# Altium PCB Strathim PCB V1.0.PcbDoc
Units mm, origin at the board's own origin, x right, y up, seen from the top; angles counter-clockwise.
Board outline 35 x 35 mm, 6 copper layers (Component Side, Ground Plane (GND), Inner Layer 1, Inner Layer 2, Power Plane (VCC), Solder Side), stack 1.297 mm thick; 74 components, 88 nets, 529 pads, 196 vias.
Unrouted connection lines stored in the file: 271.
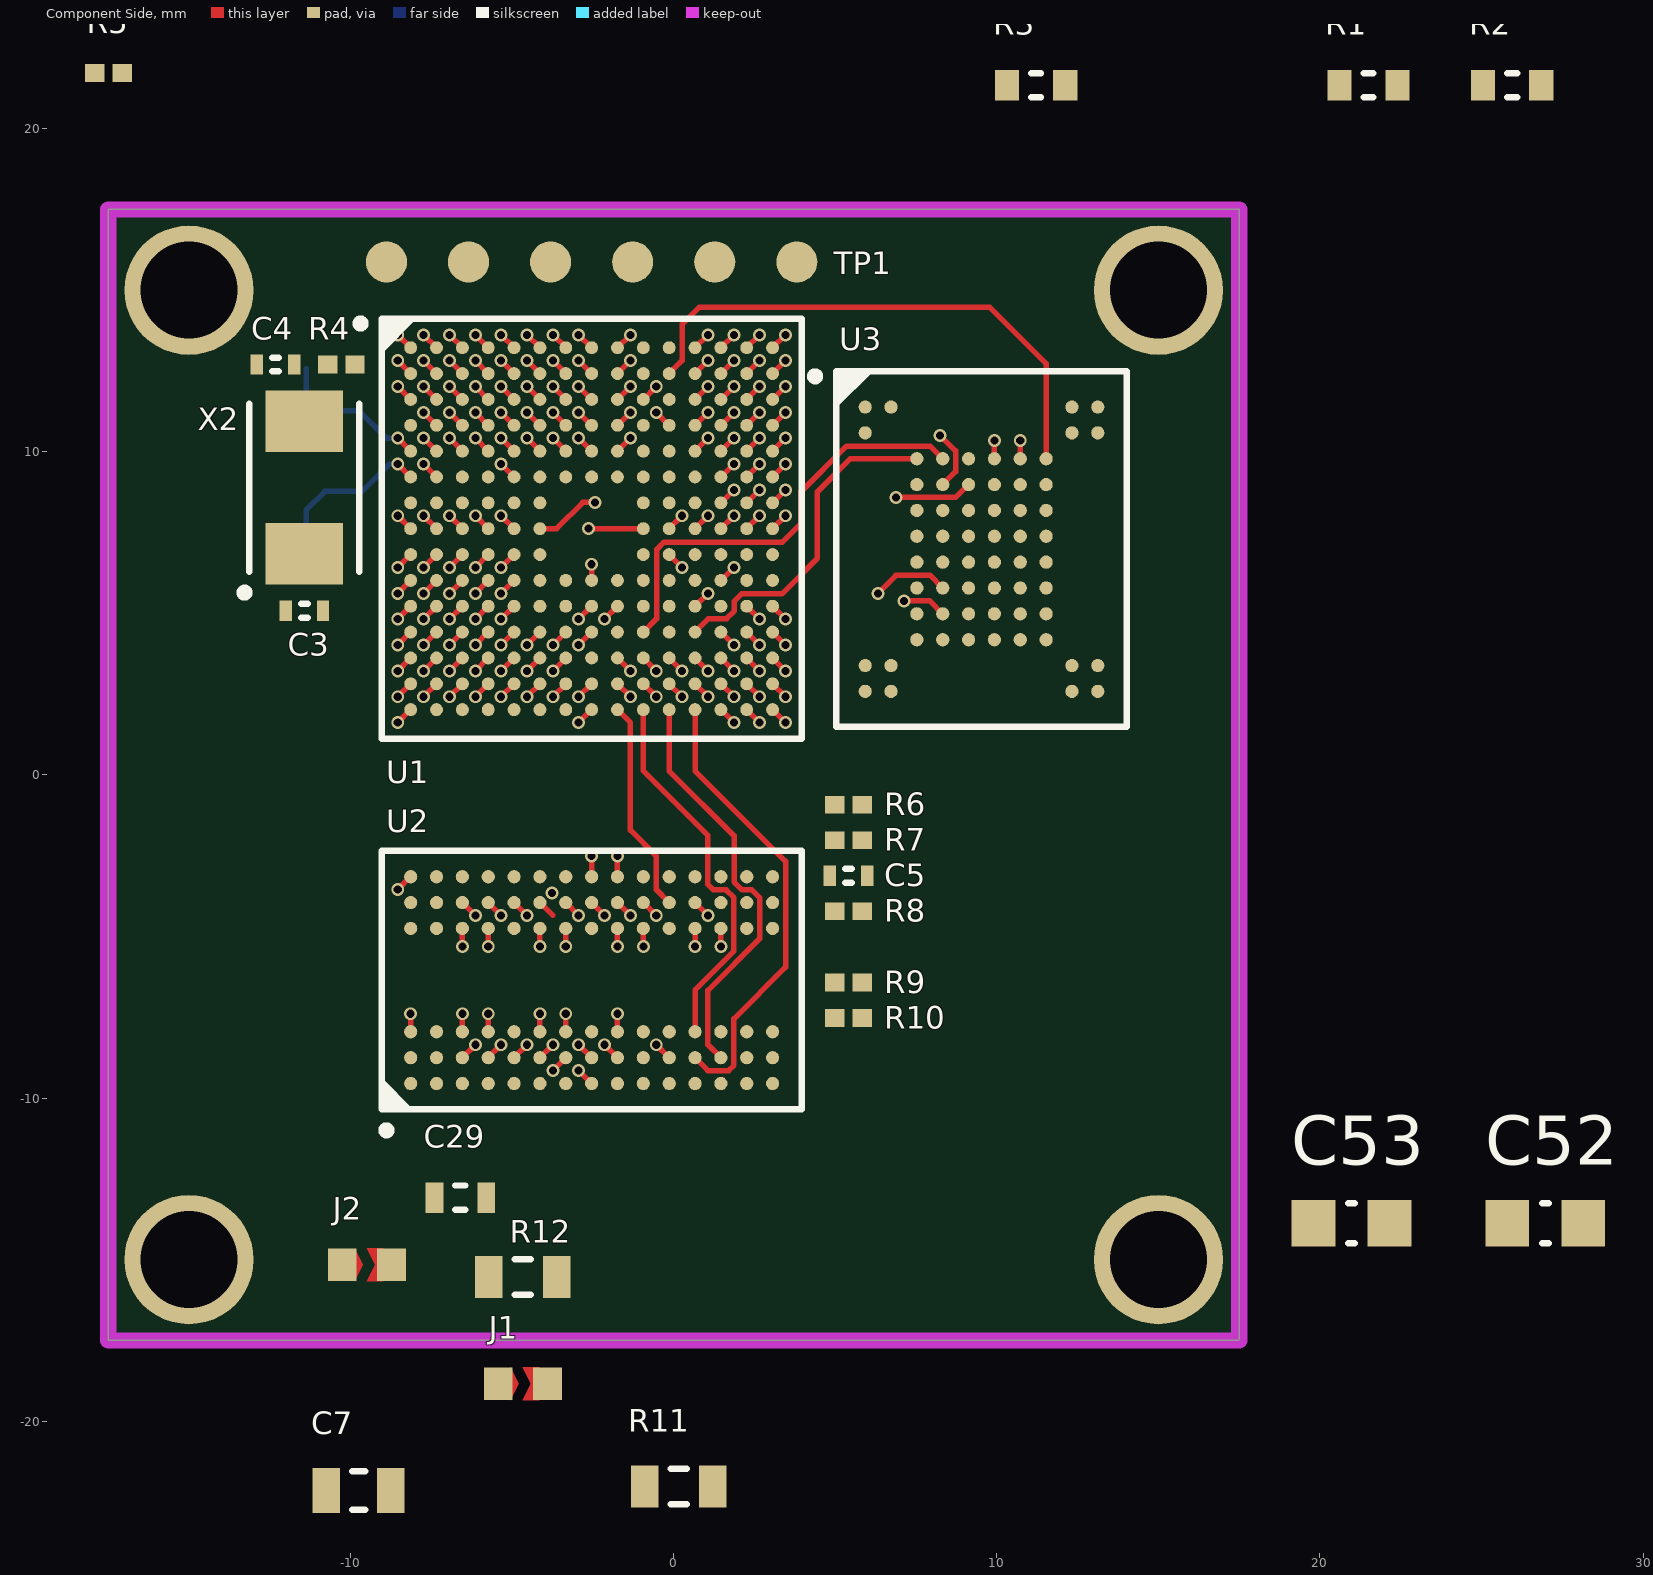
[diagram p0: Component Side view]
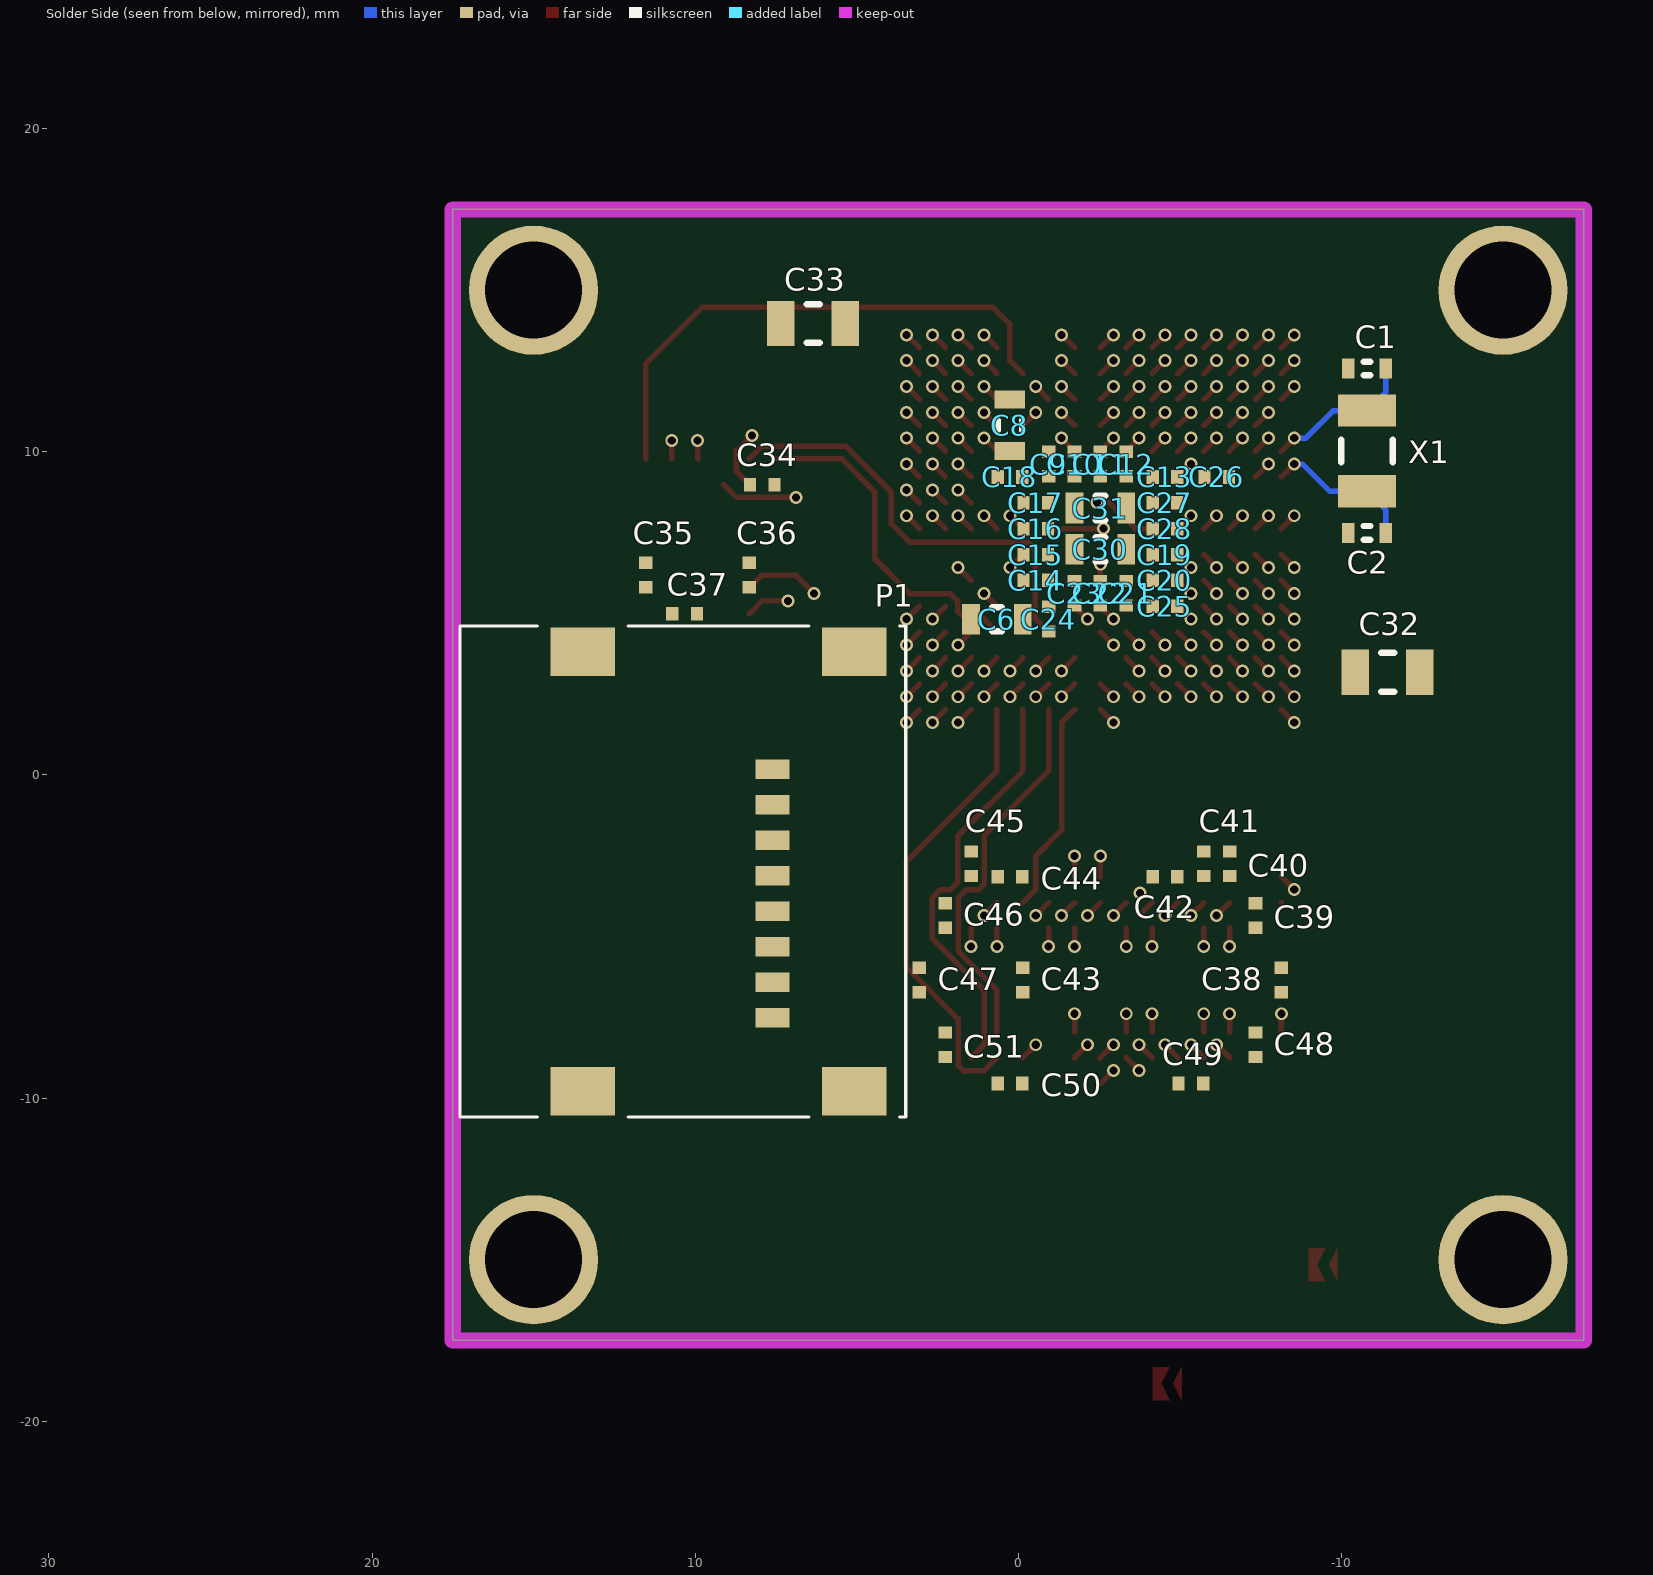
[diagram p1: Solder Side view, seen from below]
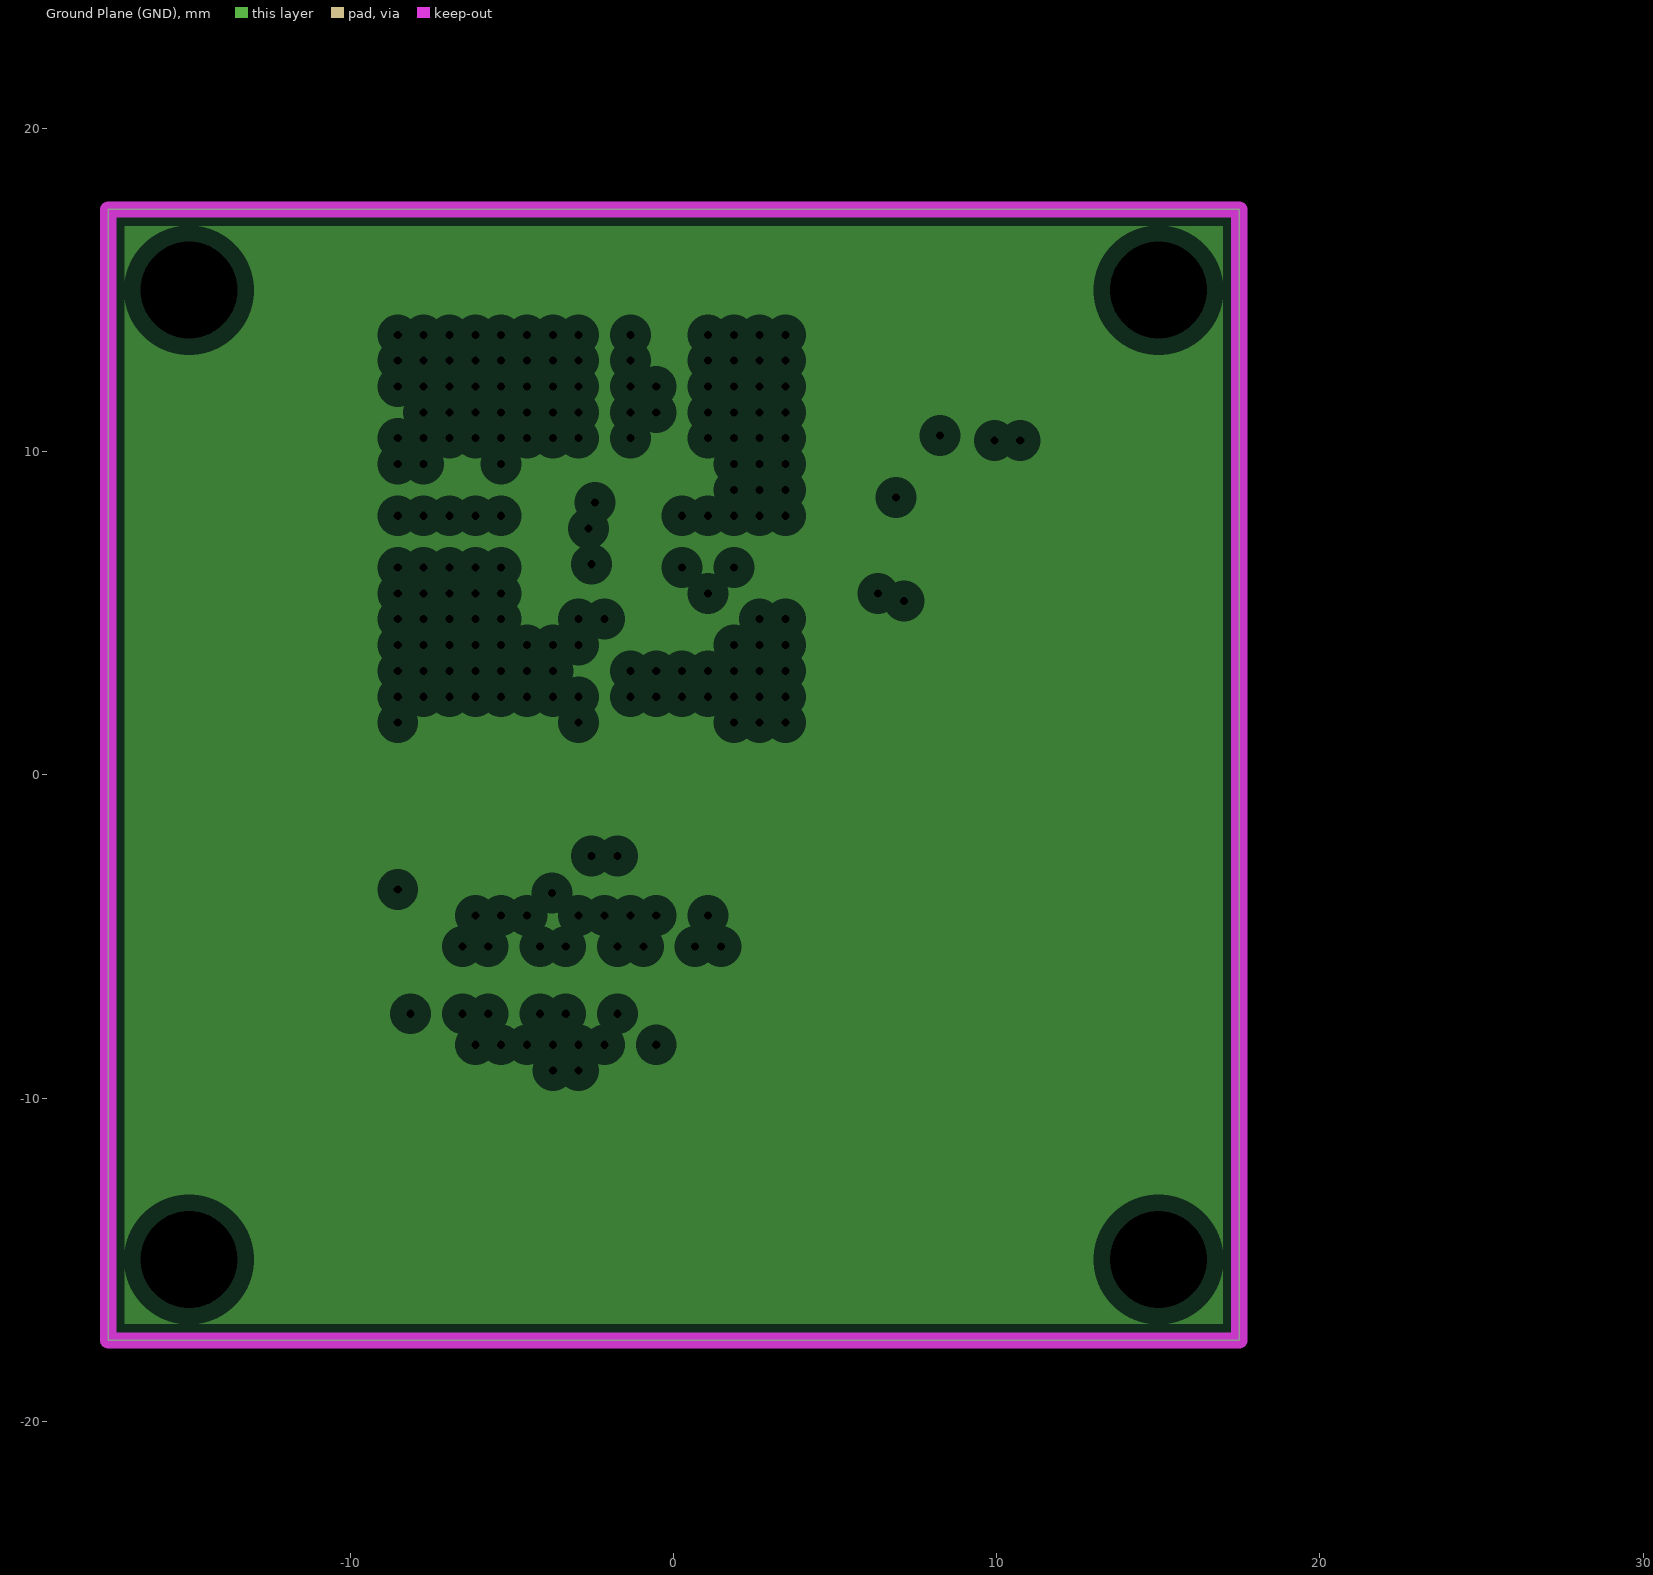
[diagram p2: Ground Plane (GND), clearances drawn from the general rule]
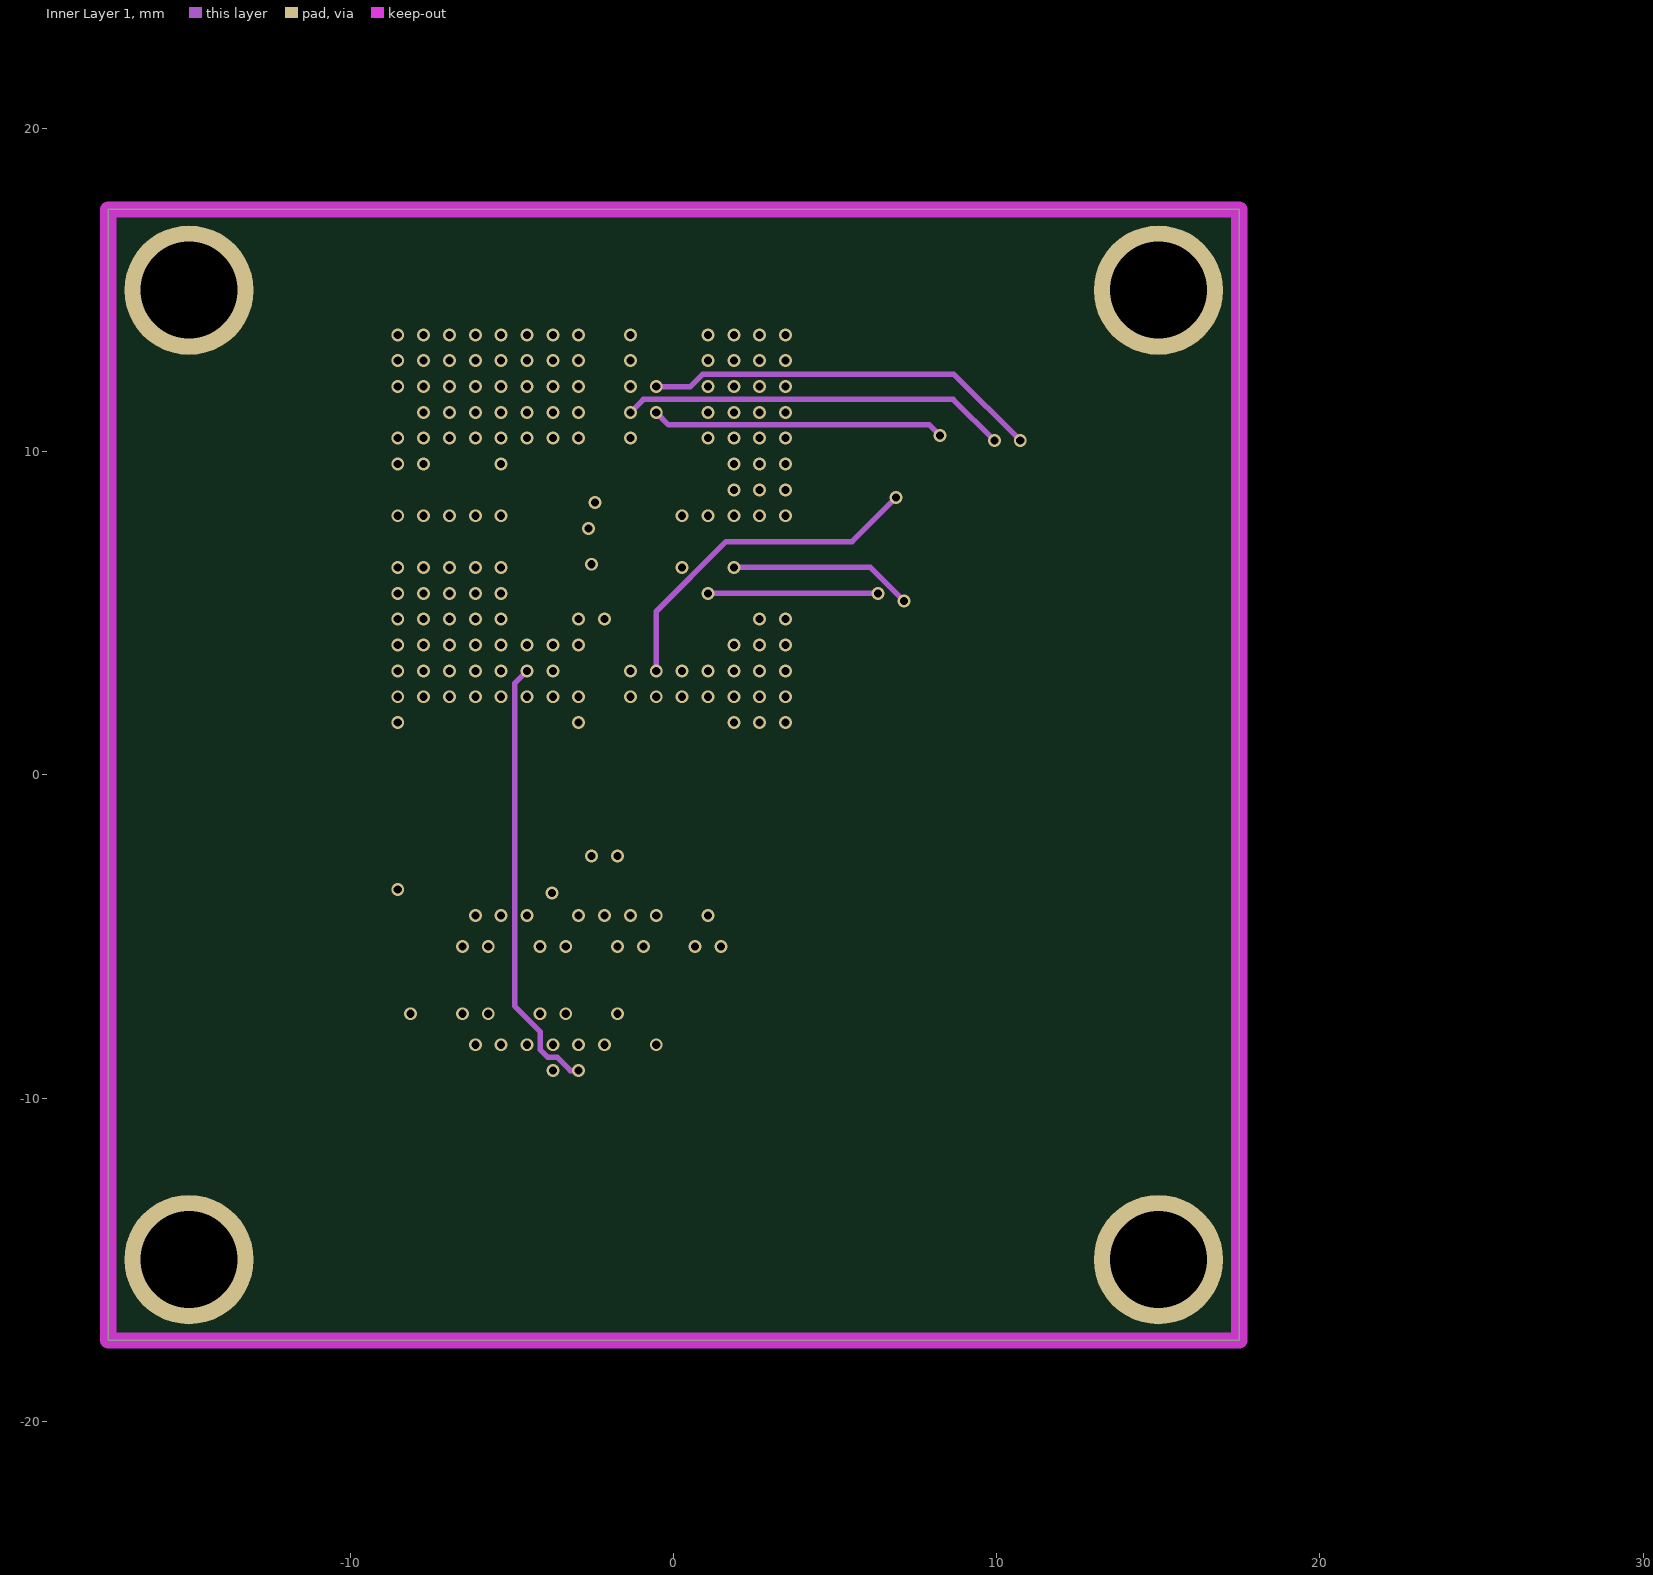
[diagram p3: Inner Layer 1]
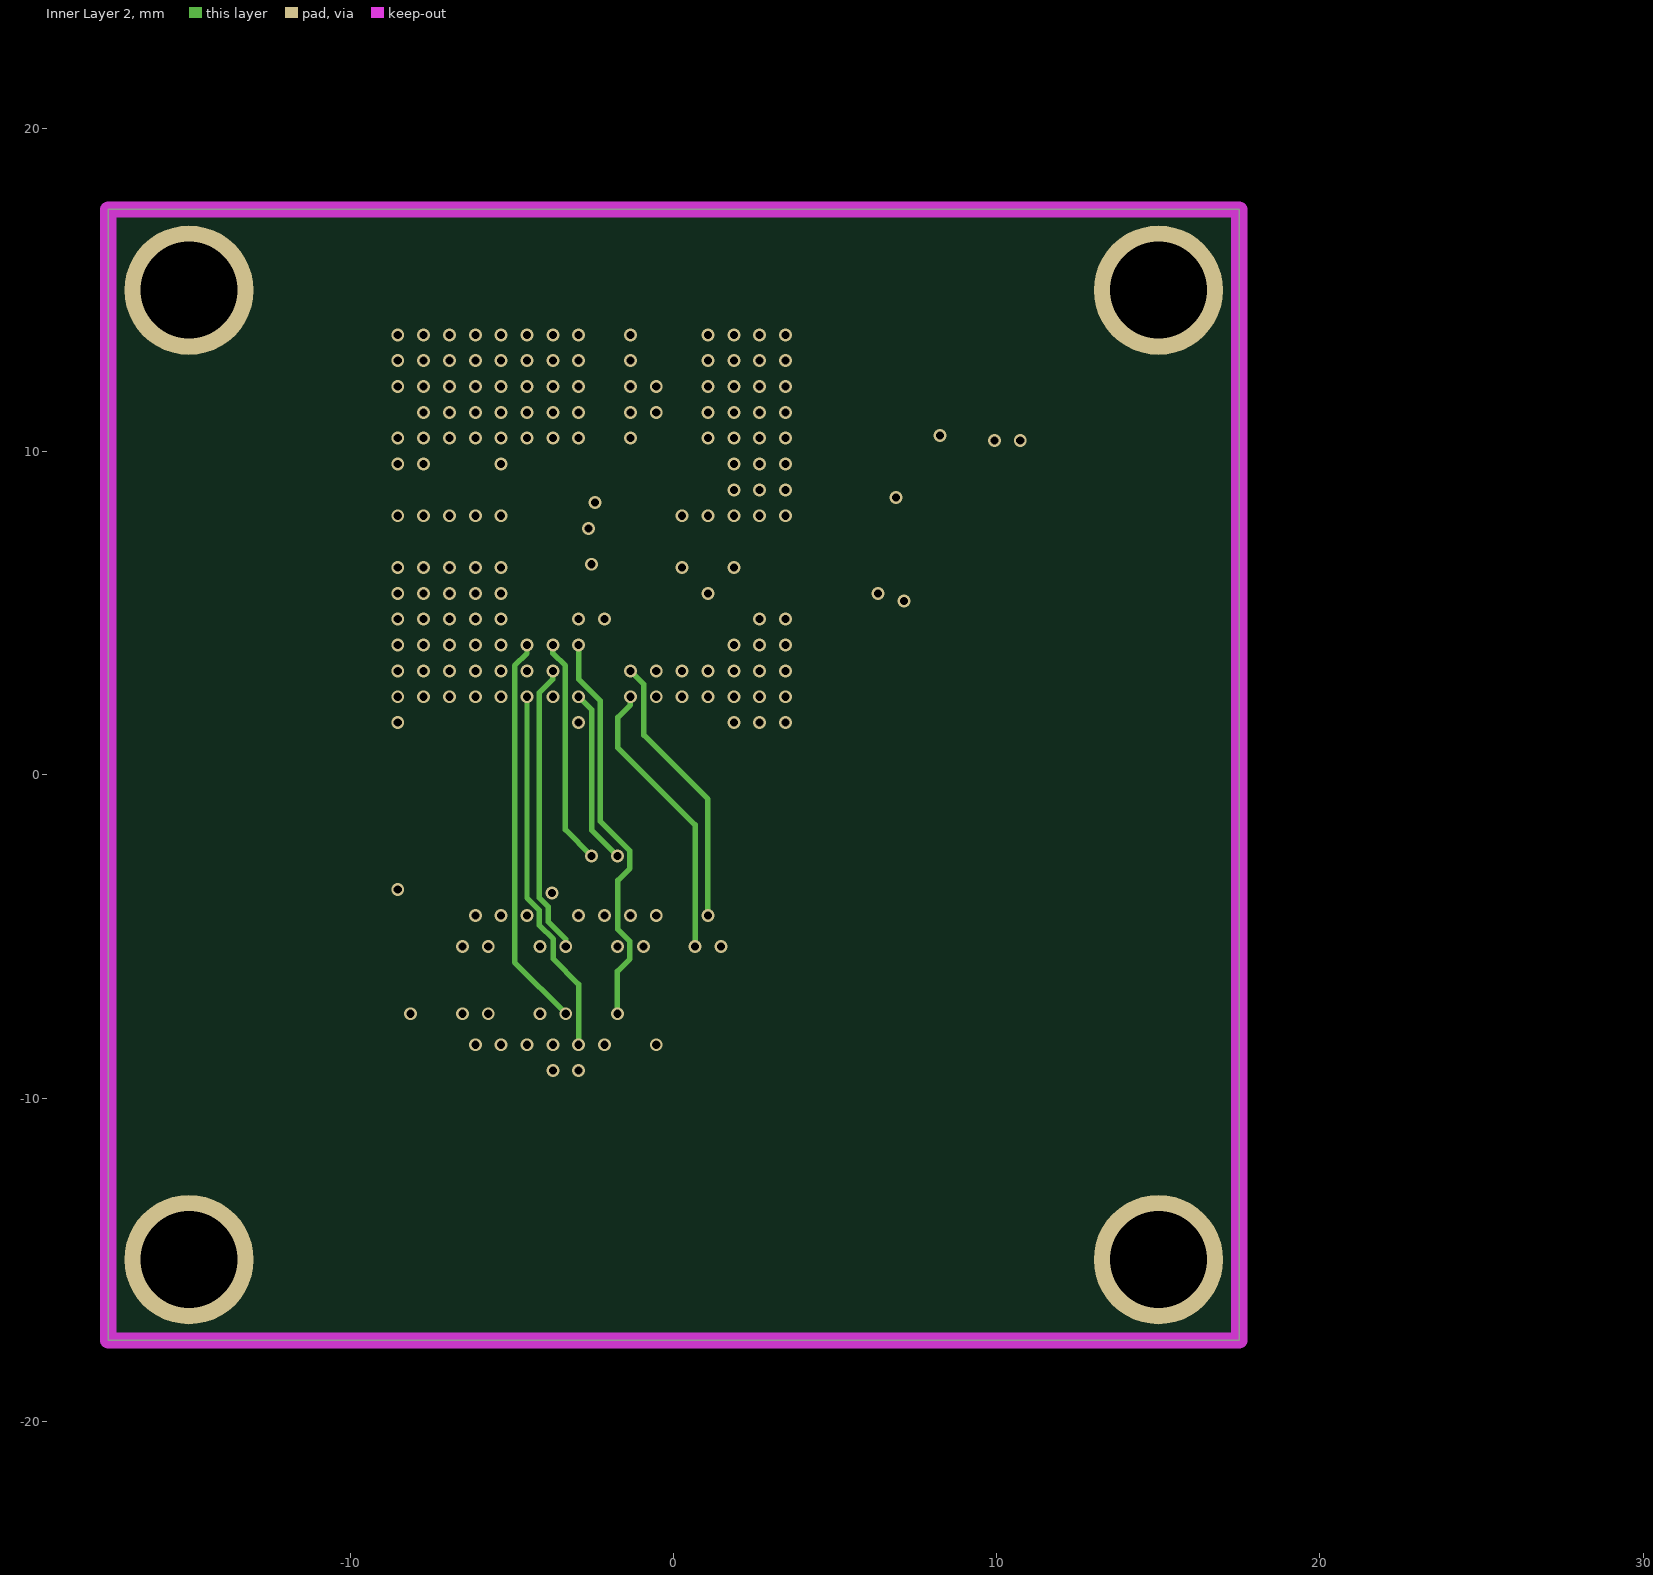
[diagram p4: Inner Layer 2]
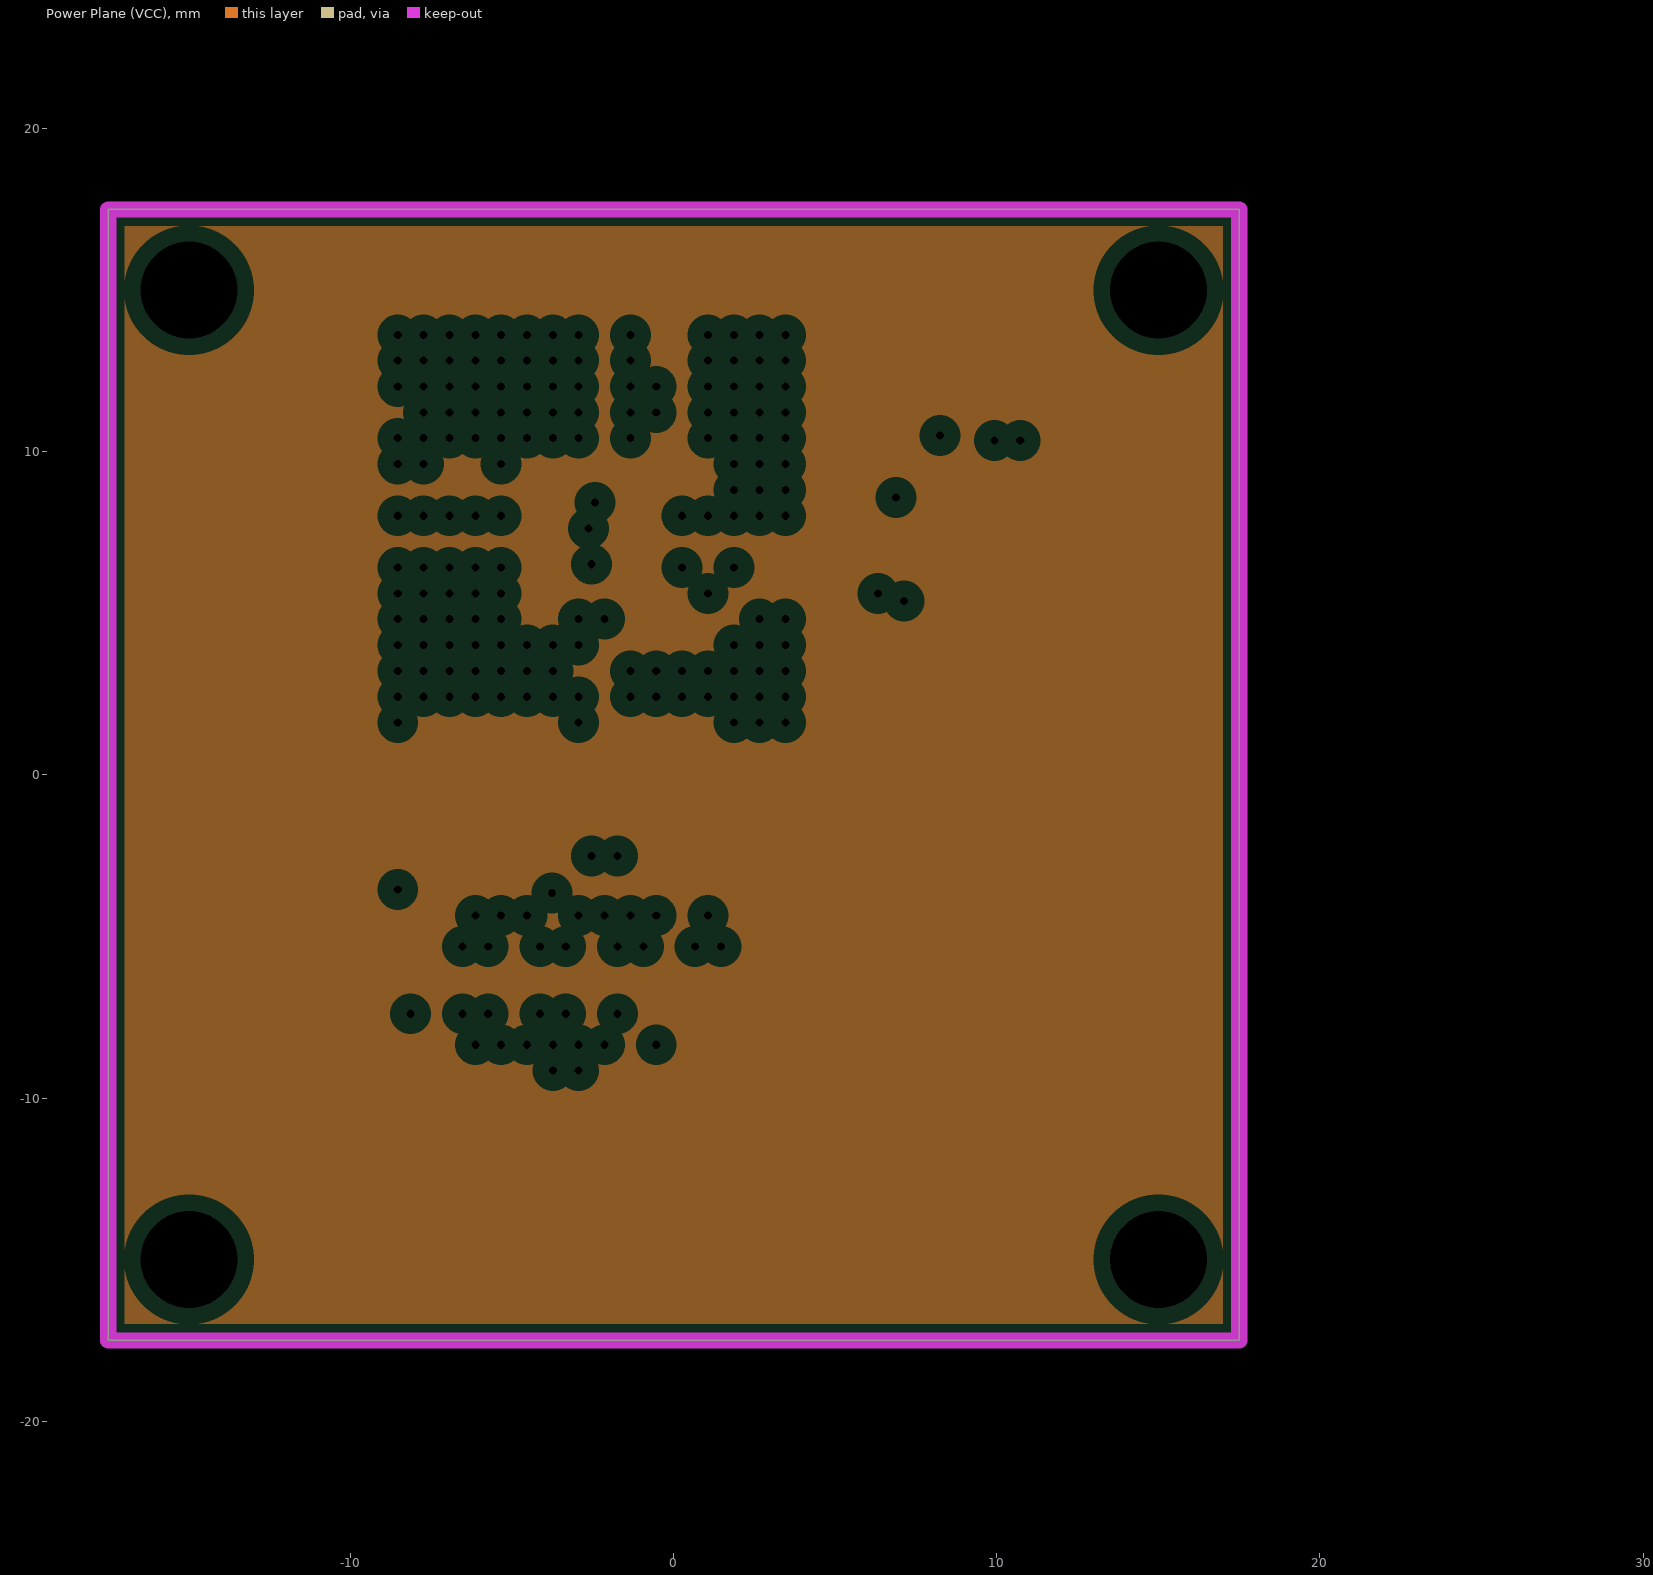
[diagram p5: Power Plane (VCC), clearances drawn from the general rule]

## Layer stack, top to bottom
Top Solder: solder mask 0.0102, Solder Resist, Dk 3.5
Component Side: signal copper 0.0356
Dielectric 1: core 0.32, FR-4, Dk 4.8
Ground Plane (GND): plane copper 0.036
Dielectric 3: prepreg 0.127, Dk 4.2
Inner Layer 1: signal copper 0.036
Dielectric 6: core 0.254, Dk 4.2
Inner Layer 2: signal copper 0.036
Dielectric 5: prepreg 0.127, Dk 4.2
Power Plane (VCC): plane copper 0.036
Dielectric 4: core 0.254, Dk 4.2
Solder Side: signal copper 0.0356
Bottom Solder: solder mask 0.0102, Solder Resist, Dk 3.5

## Board outline
-17.5,-17.5 17.5,-17.5 17.5,17.5 -17.5,17.5

## Design rules (kind name [scope] priority, off if disabled: settings)
Clearance [All] p1: gap=0.1
PlaneClearance [All] p1: clearance=0.508
PlaneConnect [All] p1: planeconnectstyle=Relief reliefexpansion=0.508 reliefentries=4 reliefconductorwidth=0.254 reliefairgap=0.254
PolygonConnect [All] p1: connectstyle=Relief reliefconductorwidth=0.254 reliefentries=4 polygonreliefangle="90 Angle" airgapwidth=0.254
RoutingVias [All] p1: holewidth=0.2 width=0.4 viastyle="Through Hole" minholewidth=0.25 minwidth=0.4 maxholewidth=0.4 maxwidth=0.8
SolderMaskExpansion [All] p1: expansion=0.102
Width [All] p1: maxlimit=2 minlimit=0.17 preferedwidth=0.17
28 further rules are at their usual default settings.

## Classes and differential pairs
component class MCU: C1 C2 C3 C4 C5 C? P1 R1 R2 R3 R4 R5 R6 R7 R8 R9 R10 R? TP1 U1 X1 X2 X?
component class RAM: C34 C35 C36 C37 C38 C39 C40 C41 C42 C43 C44 C45 C46 C47 C48 C49 C50 C51 C52 C53 U2 U3
net class RAM: NAND_ALE NAND_CLE NAND_NCE NAND_NR/B NAND_NRE NAND_NWE NAND_NWP NetC4_2 NetR4_1 RAM_ADDR0 RAM_ADDR1 RAM_ADDR2 RAM_ADDR3 RAM_ADDR4 RAM_ADDR5 RAM_ADDR6 RAM_ADDR7 RAM_ADDR8 RAM_ADDR9 RAM_ADDR10 RAM_ADDR11 RAM_I/O0 RAM_I/O1 RAM_I/O2 RAM_I/O3 RAM_I/O4 RAM_I/O5 RAM_I/O6 RAM_I/O7 RAM_I/O8 RAM_I/O9 RAM_I/O10 RAM_I/O11 RAM_I/O12 RAM_I/O13 RAM_I/O14 RAM_I/O15 RAM_I/O16 RAM_I/O17 RAM_I/O18 RAM_I/O19 RAM_I/O20 RAM_I/O21 RAM_I/O22 RAM_I/O23 RAM_I/O24 RAM_I/O25 RAM_I/O26 RAM_I/O27 RAM_I/O28 RAM_I/O29 RAM_I/O30 RAM_I/O31 SDRAM_BA0 SDRAM_BA1 SDRAM_CKE SDRAM_CLK SDRAM_DQM0 SDRAM_DQM1 SDRAM_DQM2 SDRAM_DQM3 SDRAM_NCAS SDRAM_NCS SDRAM_NRAS
net class SDMMC: SDMMC_CK SDMMC_CMD SDMMC_D0 SDMMC_D1 SDMMC_D2 SDMMC_D3
component class PWR: C6 C7 C8 C9 C10 C11 C12 C13 C14 C15 C16 C17 C18 C19 C20 C21 C22 C23 C24 C25 C26 C27 C28 C29 C30 C31 C32 C33 C? J1 J2 J? R11 R12

## Components (designator, comment, footprint, x,y, rotation, side; value= is the part's Value field where it differs from the comment)
C1 "ChipCap 12 NP0" CAP0402 -10.795,12.573 r180 bottom
C2 "ChipCap 12 NP0" CAP0402 -10.795,7.493 r180 bottom
C3 "ChipCap 18 NP0" CAP0402 -11.43,5.08 r0 top
C4 "ChipCap 18 NP0" CAP0402 -12.319,12.7 r0 top
C5 "ChipCap 0.1u X7R" CAP0402 5.41,-3.12 r0 top
C6 "ChipCap 22u X7R" CAP0603 0.66,4.82 r180 bottom
C7 "ChipCap 22u X7R" CAP0805#1 -9.751,-22.142 r0 top
C8 "ChipCap 22u X7R" CAP0603 0.26,10.82 r270 bottom
C9 "ChipCap 0.1u X7R" CAP0201 -0.94,9.62 r90 bottom
C10 "ChipCap 0.1u X7R" CAP0201 -1.74,9.62 r90 bottom
C11 "ChipCap 0.1u X7R" CAP0201 -2.54,9.62 r90 bottom
C12 "ChipCap 0.1u X7R" CAP0201 -3.34,9.62 r90 bottom
C13 "ChipCap 0.1u X7R" CAP0201 -4.54,9.22 r180 bottom
C14 "ChipCap 0.1u X7R" CAP0201 -0.54,6.02 r0 bottom
C15 "ChipCap 0.1u X7R" CAP0201 -0.54,6.82 r0 bottom
C16 "ChipCap 0.1u X7R" CAP0201 -0.54,7.62 r0 bottom
C17 "ChipCap 0.1u X7R" CAP0201 -0.54,8.42 r0 bottom
C18 "ChipCap 0.1u X7R" CAP0201 0.26,9.22 r180 bottom
C19 "ChipCap 0.1u X7R" CAP0201 -4.54,6.82 r180 bottom
C20 "ChipCap 0.1u X7R" CAP0201 -4.54,6.02 r180 bottom
C21 "ChipCap 0.1u X7R" CAP0201 -3.34,5.62 r270 bottom
C22 "ChipCap 0.1u X7R" CAP0201 -2.54,5.62 r270 bottom
C23 "ChipCap 0.1u X7R" CAP0201 -1.74,5.62 r270 bottom
C24 "ChipCap 0.1u X7R" CAP0201 -0.94,4.82 r90 bottom
C25 "ChipCap 0.1u X7R" CAP0201 -4.54,5.22 r180 bottom
C26 "ChipCap 0.1u X7R" CAP0201 -6.14,9.22 r0 bottom
C27 "ChipCap 0.1u X7R" CAP0201 -4.54,8.42 r180 bottom
C28 "ChipCap 0.1u X7R" CAP0201 -4.54,7.62 r180 bottom
C29 "ChipCap 0.1u X7R" CAP0603 -6.604,-13.081 r0 top
C30 "ChipCap 22u X7R" CAP0603 -2.54,6.98 r180 bottom
C31 "ChipCap 22u X7R" CAP0603 -2.54,8.26 r180 bottom
C32 "ChipCap 22u X7R" CAP0805#1 -11.43,3.175 r180 bottom
C33 "ChipCap 22u X7R" CAP0805#1 6.35,13.97 r0 bottom
C34 "ChipCap 0.1u X7R" CAP0201 7.925,8.985 r180 bottom
C35 "ChipCap 0.1u X7R" CAP0201 11.525,6.185 r270 bottom
C36 "ChipCap 0.1u X7R" CAP0201 8.325,6.185 r90 bottom
C37 "ChipCap 0.1u X7R" CAP0201 10.325,4.985 r180 bottom
C38 "ChipCap 0.1u X7R" CAP0201 -8.14,-6.35 r90 bottom
C39 "ChipCap 0.1u X7R" CAP0201 -7.34,-4.35 r270 bottom
C40 "ChipCap 0.1u X7R" CAP0201 -6.54,-2.75 r270 bottom
C41 "ChipCap 0.1u X7R" CAP0201 -5.74,-2.75 r270 bottom
C42 "ChipCap 0.1u X7R" CAP0201 -4.54,-3.15 r0 bottom
C43 "ChipCap 0.1u X7R" CAP0201 -0.14,-6.35 r90 bottom
C44 "ChipCap 0.1u X7R" CAP0201 0.26,-3.15 r0 bottom
C45 "ChipCap 0.1u X7R" CAP0201 1.46,-2.75 r270 bottom
C46 "ChipCap 0.1u X7R" CAP0201 2.26,-4.35 r270 bottom
C47 "ChipCap 0.1u X7R" CAP0201 3.06,-6.35 r90 bottom
C48 "ChipCap 0.1u X7R" CAP0201 -7.34,-8.35 r270 bottom
C49 "ChipCap 0.1u X7R" CAP0201 -5.34,-9.55 r0 bottom
C50 "ChipCap 0.1u X7R" CAP0201 0.26,-9.55 r180 bottom
C51 "ChipCap 0.1u X7R" CAP0201 2.26,-8.35 r270 bottom
C52 "ChipCap 10u X7R" CAP0805#2 26.975,-13.875 r0 top
C53 "ChipCap 10u X7R" CAP0805#2 20.975,-13.875 r0 top
J1 "Jumper" J0603 -4.671,-18.84 r0 top
J2 "Jumper" J0603 -9.497,-15.157 r0 top
P1 "Micro SD Card Connector" "WR-CRD SD Micro" 13.48,-9.79 r90 bottom
R1 "RES0603 10K 1%" RES0603 21.503,21.343 r0 top
R2 "RES0603 10K 1%" RES0603 25.948,21.343 r0 top
R3 "RES0603 10K 1%" RES0603 11.216,21.343 r0 top
R4 "RES0402 330R 1%" RES0402 -10.287,12.7 r180 top
R5 "RES0402 10K 1%" RES0402 -17.486,21.724 r0 top
R6 "RES0402 10K 1%" RES0402 5.41,-0.92 r180 top
R7 "RES0402 10K 1%" RES0402 5.41,-2.02 r180 top
R8 "RES0402 10K 1%" RES0402 5.41,-4.22 r180 top
R9 "RES0402 10K 1%" RES0402 5.41,-6.42 r180 top
R10 "RES0402 10K 1%" RES0402 5.41,-7.52 r180 top
R11 "ChipRes 10K 1%" RES0805 0.155,-22.015 r0 top
R12 "ChipRes 10K 1%" RES0805 -4.671,-15.538 r0 top
TP1 "Test Point 5x2" PG-1.5-13.5-6P-2.54PH 3.81,15.875 r270 top
U1 "STM32F746NGH6" TFBGA216 -2.54,7.62 r0 top
U2 "MT48LC4M32B2B5-6A IT:L" VFBGA-90 -2.54,-6.35 r90 top
U3 "MT29F1G08ABADAH4-IT:D" "VFBGA-63 (H4 9x11)" 9.525,6.985 r0 top
X1 "XTAL" KX-327NHT -10.795,10.025 r270 bottom
X2 "XTAL" "ABM3 Ceramic Crystal" -11.43,8.89 r90 top

## Footprints (in the part's own frame and the unit in brackets; to place one, negate y for a bottom-side part, rotate by r counter-clockwise, add the part's x,y. Pads: shape width x height; smd on the part's side, far side on the other; paste and mask are expansions set on the pad)
"ABM3 Ceramic Crystal" [mm]
  rect 1.9x2.4 smd: 1(-2.05,0) 2(2.05,0)
  silkscreen extent -3.37,-1.7 2.6,1.97, body extent -2.5,-1.6 2.5,1.6, height 1.3
CAP0201 [mm] "Chip Capacitor, 2-Leads, Body 0.60x0.30mm, IPC Medium Density"
  rect 0.38x0.42 smd: 1(-0.38,0) 2(0.38,0)
  body extent -0.32,-0.17 0.32,0.17, height 0.5
CAP0402 [mm] "Chip Capacitor, 2-Leads, Body 1.00x0.50mm, IPC Medium Density"
  rect 0.38x0.62 smd: 1(-0.58,0) 2(0.58,0)
  silkscreen extent -0.1,-0.21 0.1,0.21, body extent -0.53,-0.28 0.53,0.28, height 0.5
CAP0603 [mm] "Chip Capacitor, 2-Leads, Body 1.60x0.80mm, IPC Medium Density"
  rect 0.55x0.95 smd: 1(-0.8,0) 2(0.8,0)
  silkscreen extent -0.15,-0.38 0.15,0.38, body extent -0.85,-0.45 0.85,0.45, height 0.8
CAP0805#1 [mm] "Chip Capacitor, 2-Leads, Body 2.00x1.25mm, IPC Medium Density"
  rect 0.85x1.4 smd: 1(-1,0) 2(1,0)
  silkscreen extent -0.2,-0.6 0.2,0.6, body extent -1.05,-0.67 1.05,0.67, height 0.6
CAP0805#2 [mm]
  rect 1.35x1.45 smd: 1(-1.175,0) 2(1.175,0)
  silkscreen extent -0.1,-0.63 0.1,0.63, body extent -1,-0.62 1,0.63, height 0.3
J0603 [mil]
  rect 35x40 smd: 1(-30,0) 2(30,0)
  Component Side region: -15,-20 -15,20 -5,0
  Component Side region: 0,20 10,0 0,-20 20,-20 20,20
KX-327NHT [mm] "Quartz Crystal 32.768KHz"
  rect 1x1.8 smd: 1(-1.25,0) 2(1.25,0)
  silkscreen extent -0.35,-0.8 0.35,0.8, body extent -1.6,-0.75 1.6,0.75, height 0.71
PG-1.5-13.5-6P-2.54PH [mm]
  round 1.27 smd paste-2: 1(0,0) 2(0,-2.54) 3(0,-5.08) 4(0,-7.62) 5(0,-10.16) 6(0,-12.7)
RES0402 [mm] "Chip Resistor, 2-Leads, Body 1.00x0.50mm, IPC Medium Density"
  rect 0.6x0.55 smd: 1(-0.425,0) 2(0.425,0)
  body extent -0.53,-0.28 0.53,0.28, height 0.35
RES0603 [mm] "Chip Resistor, 2-Leads, Body 1.60x0.85mm, IPC Medium Density"
  rect 0.75x0.95 smd: 1(-0.9,0) 2(0.9,0)
  silkscreen extent -0.15,-0.38 0.15,0.38, body extent -0.84,-0.42 0.8,0.42, height 0.46
RES0805 [mm] "Chip Resistor, 2-Leads, Body 2.00x1.27mm, IPC Medium Density"
  rect 0.85x1.3 smd: 1(-1.05,0) 2(1.05,0)
  silkscreen extent -0.25,-0.55 0.25,0.55, body extent -1.15,-0.67 1.15,0.68, height 0.76
TFBGA216 [mm] "BGA, 216-Leads, Body 13,00x13,00mmx1,10mm, Pitch 0,80mm"
  round 0.4 smd: A1(-5.6,5.6) A2(-4.8,5.6) A3(-4,5.6) A4(-3.2,5.6) A5(-2.4,5.6) A6(-1.6,5.6) A7(-0.8,5.6) A8(0,5.6) A9(0.8,5.6) A10(1.6,5.6) A11(2.4,5.6) A12(3.2,5.6) A13(4,5.6) A14(4.8,5.6) A15(5.6,5.6) B1(-5.6,4.8) B2(-4.8,4.8) B3(-4,4.8) B4(-3.2,4.8) B5(-2.4,4.8) B6(-1.6,4.8) B7(-0.8,4.8) B8(0,4.8) B9(0.8,4.8) B10(1.6,4.8) B11(2.4,4.8) B12(3.2,4.8) B13(4,4.8) B14(4.8,4.8) B15(5.6,4.8) C1(-5.6,4) C2(-4.8,4) C3(-4,4) C4(-3.2,4) C5(-2.4,4) C6(-1.6,4) C7(-0.8,4) C8(0,4) C9(0.8,4) C10(1.6,4) C11(2.4,4) C12(3.2,4) C13(4,4) C14(4.8,4) C15(5.6,4) D1(-5.6,3.2) D2(-4.8,3.2) D3(-4,3.2) D4(-3.2,3.2) D5(-2.4,3.2) D6(-1.6,3.2) D7(-0.8,3.2) D8(0,3.2) D9(0.8,3.2) D10(1.6,3.2) D11(2.4,3.2) D12(3.2,3.2) D13(4,3.2) D14(4.8,3.2) D15(5.6,3.2) E1(-5.6,2.4) E2(-4.8,2.4) E3(-4,2.4) E4(-3.2,2.4) E5(-2.4,2.4) E6(-1.6,2.4) E7(-0.8,2.4) E8(0,2.4) E9(0.8,2.4) E10(1.6,2.4) E11(2.4,2.4) E12(3.2,2.4) E13(4,2.4) E14(4.8,2.4) E15(5.6,2.4) F1(-5.6,1.6) F2(-4.8,1.6) F3(-4,1.6) F4(-3.2,1.6) F5(-2.4,1.6) F6(-1.6,1.6) F7(-0.8,1.6) F8(0,1.6) F9(0.8,1.6) F10(1.6,1.6) F11(2.4,1.6) F12(3.2,1.6) F13(4,1.6) F14(4.8,1.6) F15(5.6,1.6) G1(-5.6,0.8) G2(-4.8,0.8) G3(-4,0.8) G4(-3.2,0.8) G5(-2.4,0.8) G6(-1.6,0.8) G10(1.6,0.8) G11(2.4,0.8) G12(3.2,0.8) G13(4,0.8) G14(4.8,0.8) G15(5.6,0.8) H1(-5.6,0) H2(-4.8,0) H3(-4,0) H4(-3.2,0) H5(-2.4,0) H6(-1.6,0) H10(1.6,0) H11(2.4,0) H12(3.2,0) H13(4,0) H14(4.8,0) H15(5.6,0) J1(-5.6,-0.8) J2(-4.8,-0.8) J3(-4,-0.8) J4(-3.2,-0.8) J5(-2.4,-0.8) J6(-1.6,-0.8) J10(1.6,-0.8) J11(2.4,-0.8) J12(3.2,-0.8) J13(4,-0.8) J14(4.8,-0.8) J15(5.6,-0.8) K1(-5.6,-1.6) K2(-4.8,-1.6) K3(-4,-1.6) K4(-3.2,-1.6) K5(-2.4,-1.6) K6(-1.6,-1.6) K7(-0.8,-1.6) K8(0,-1.6) K9(0.8,-1.6) K10(1.6,-1.6) K11(2.4,-1.6) K12(3.2,-1.6) K13(4,-1.6) K14(4.8,-1.6) K15(5.6,-1.6) L1(-5.6,-2.4) L2(-4.8,-2.4) L3(-4,-2.4) L4(-3.2,-2.4) L5(-2.4,-2.4) L6(-1.6,-2.4) L7(-0.8,-2.4) L8(0,-2.4) L9(0.8,-2.4) L10(1.6,-2.4) L11(2.4,-2.4) L12(3.2,-2.4) L13(4,-2.4) L14(4.8,-2.4) L15(5.6,-2.4) M1(-5.6,-3.2) M2(-4.8,-3.2) M3(-4,-3.2) M4(-3.2,-3.2) M5(-2.4,-3.2) M6(-1.6,-3.2) M7(-0.8,-3.2) M8(0,-3.2) M9(0.8,-3.2) M10(1.6,-3.2) M11(2.4,-3.2) M12(3.2,-3.2) M13(4,-3.2) M14(4.8,-3.2) M15(5.6,-3.2) N1(-5.6,-4) N2(-4.8,-4) N3(-4,-4) N4(-3.2,-4) N5(-2.4,-4) N6(-1.6,-4) N7(-0.8,-4) N8(0,-4) N9(0.8,-4) N10(1.6,-4) N11(2.4,-4) N12(3.2,-4) N13(4,-4) N14(4.8,-4) N15(5.6,-4) P1(-5.6,-4.8) P2(-4.8,-4.8) P3(-4,-4.8) P4(-3.2,-4.8) P5(-2.4,-4.8) P6(-1.6,-4.8) P7(-0.8,-4.8) P8(0,-4.8) P9(0.8,-4.8) P10(1.6,-4.8) P11(2.4,-4.8) P12(3.2,-4.8) P13(4,-4.8) P14(4.8,-4.8) P15(5.6,-4.8) R1(-5.6,-5.6) R2(-4.8,-5.6) R3(-4,-5.6) R4(-3.2,-5.6) R5(-2.4,-5.6) R6(-1.6,-5.6) R7(-0.8,-5.6) R8(0,-5.6) R9(0.8,-5.6) R10(1.6,-5.6) R11(2.4,-5.6) R12(3.2,-5.6) R13(4,-5.6) R14(4.8,-5.6) R15(5.6,-5.6)
  silkscreen extent -7.27,-6.5 6.5,6.5, body extent -6.5,-6.5 6.5,6.5, height 1.1
"VFBGA-63 (H4 9x11)" [mm] "VFBGA, 63-Leads, Body 9.00x11.00mmx1.00mm, Pitch 0.80mm"
  round 0.41 smd: A1(-3.6,4.4) A2(-2.8,4.4) A9(2.8,4.4) A10(3.6,4.4) B1(-3.6,3.6) B9(2.8,3.6) B10(3.6,3.6) C3(-2,2.8) C4(-1.2,2.8) C5(-0.4,2.8) C6(0.4,2.8) C7(1.2,2.8) C8(2,2.8) D3(-2,2) D4(-1.2,2) D5(-0.4,2) D6(0.4,2) D7(1.2,2) D8(2,2) E3(-2,1.2) E4(-1.2,1.2) E5(-0.4,1.2) E6(0.4,1.2) E7(1.2,1.2) E8(2,1.2) F3(-2,0.4) F4(-1.2,0.4) F5(-0.4,0.4) F6(0.4,0.4) F7(1.2,0.4) F8(2,0.4) G3(-2,-0.4) G4(-1.2,-0.4) G5(-0.4,-0.4) G6(0.4,-0.4) G7(1.2,-0.4) G8(2,-0.4) H3(-2,-1.2) H4(-1.2,-1.2) H5(-0.4,-1.2) H6(0.4,-1.2) H7(1.2,-1.2) H8(2,-1.2) J3(-2,-2) J4(-1.2,-2) J5(-0.4,-2) J6(0.4,-2) J7(1.2,-2) J8(2,-2) K3(-2,-2.8) K4(-1.2,-2.8) K5(-0.4,-2.8) K6(0.4,-2.8) K7(1.2,-2.8) K8(2,-2.8) L1(-3.6,-3.6) L2(-2.8,-3.6) L9(2.8,-3.6) L10(3.6,-3.6) M1(-3.6,-4.4) M2(-2.8,-4.4) M9(2.8,-4.4) M10(3.6,-4.4)
  silkscreen extent -5.27,-5.5 4.5,5.5, body extent -4.5,-5.5 4.5,5.5, height 1
VFBGA-90 [mm] "VFBGA, 90-Leads, Body 8.00x13.00mmx1.00mm, Pitch 0.80mm"
  round 0.41 smd: A1(-3.2,5.6) A2(-2.4,5.6) A3(-1.6,5.6) A7(1.6,5.6) A8(2.4,5.6) A9(3.2,5.6) B1(-3.2,4.8) B2(-2.4,4.8) B3(-1.6,4.8) B7(1.6,4.8) B8(2.4,4.8) B9(3.2,4.8) C1(-3.2,4) C2(-2.4,4) C3(-1.6,4) C7(1.6,4) C8(2.4,4) C9(3.2,4) D1(-3.2,3.2) D2(-2.4,3.2) D3(-1.6,3.2) D7(1.6,3.2) D8(2.4,3.2) D9(3.2,3.2) E1(-3.2,2.4) E2(-2.4,2.4) E3(-1.6,2.4) E7(1.6,2.4) E8(2.4,2.4) E9(3.2,2.4) F1(-3.2,1.6) F2(-2.4,1.6) F3(-1.6,1.6) F7(1.6,1.6) F8(2.4,1.6) F9(3.2,1.6) G1(-3.2,0.8) G2(-2.4,0.8) G3(-1.6,0.8) G7(1.6,0.8) G8(2.4,0.8) G9(3.2,0.8) H1(-3.2,0) H2(-2.4,0) H3(-1.6,0) H7(1.6,0) H8(2.4,0) H9(3.2,0) J1(-3.2,-0.8) J2(-2.4,-0.8) J3(-1.6,-0.8) J7(1.6,-0.8) J8(2.4,-0.8) J9(3.2,-0.8) K1(-3.2,-1.6) K2(-2.4,-1.6) K3(-1.6,-1.6) K7(1.6,-1.6) K8(2.4,-1.6) K9(3.2,-1.6) L1(-3.2,-2.4) L2(-2.4,-2.4) L3(-1.6,-2.4) L7(1.6,-2.4) L8(2.4,-2.4) L9(3.2,-2.4) M1(-3.2,-3.2) M2(-2.4,-3.2) M3(-1.6,-3.2) M7(1.6,-3.2) M8(2.4,-3.2) M9(3.2,-3.2) N1(-3.2,-4) N2(-2.4,-4) N3(-1.6,-4) N7(1.6,-4) N8(2.4,-4) N9(3.2,-4) P1(-3.2,-4.8) P2(-2.4,-4.8) P3(-1.6,-4.8) P7(1.6,-4.8) P8(2.4,-4.8) P9(3.2,-4.8) R1(-3.2,-5.6) R2(-2.4,-5.6) R3(-1.6,-5.6) R7(1.6,-5.6) R8(2.4,-5.6) R9(3.2,-5.6)
  silkscreen extent -4.77,-6.5 4,6.5, body extent -4,-6.5 4,6.5, height 1
"WR-CRD SD Micro" [mm] "WR-CRD SD Micro Header 8"
  rect 1.5x2 smd: 0(0,-8.4) 0(0,0) 0(13.6,-8.4) 0(13.6,0)
  rect 0.6x1.05 smd: 1(2.27,-5.87) 2(3.37,-5.87) 3(4.47,-5.87) 4(5.57,-5.87) 5(6.67,-5.87) 6(7.77,-5.87) 7(8.87,-5.87) 8(9.97,-5.87)
  silkscreen extent -0.8,-10 14.4,3.8, body extent -0.5,-9.9 14.1,3.8, height 1.77

## Part data
C1 C2 C3 C4: "Surface-mount ceramic multilayer capacitor"
C5 C9 C10 C11 C12 C13 C14 C15 C16 C17 C18 C19 C20 C21 C22 C23 C24 C25 C26 C27 C28 C29 C34 C35 C36 C37 C38 C39 C40 C41 C42 C43 C44 C45 C46 C47 C48 C49 C50 C51: library part "ChipCap 0.1uF X7R", "Surface-mount ceramic multilayer capacitor"
C6 C7 C8 C30 C31 C32 C33: library part "ChipCap 22uF X7R", "Surface-mount ceramic multilayer capacitor"
C52 C53: library part "ChipCap 10uF X7R", "Surface-mount ceramic multilayer capacitor"
P1: library part MicroSDHeader8
R1 R2 R3 R4 R5 R6 R7 R8 R9 R10 R11 R12: "Think Film Chip resistor"
TP1: library part PG-1.5-13.5-6P-2.54PH
U1: "ARM Cortex M7, 462DMIPS, 1MB Flash"
U2: "SDRAM 128Mbit"
U3: "FLASH RAM 1Gbit"
X1: library part "Crystall oscillator", "Quartz crystall oscillator"
X2: library part "ABM3 Ceramic SMD Crystal", "Quartz crystall oscillator"

## Free pads (board coordinates)
  round 4 hole 3 unplated: H0(-15,15) H1(15,15) H2(15,-15) H4(-15,-15)

## Via types
v1: diameter 0.4, hole 0.25, Component Side to Solder Side, tented both sides, 148 vias
v2: diameter 0.4, hole 0.25, Component Side to Solder Side, 48 vias

## Nets (pads, with @x,y where several pads share a name; then routed paths per layer and width w, separated by ;. In a path a pad name is that pad's centre, name@x,y a point inside that pad or via, vN(x,y) a via of type N, cw(c..) or ccw(c..) an arc to the next point about the centre after c; other vN are vias at no path point)
+3V3: C5.2 C7.1 C9.2 C10.2 C11.2 C12.2 C13.2 C14.2 C15.2 C16.2 C17.2 C18.2 C19.2 C20.2 C21.2 C22.2 C23.2 C24.2 C25.2 C26.2 C27.2 C28.2 C30.1 C31.1 C32.1 C33.1 C34.2 C35.2 C36.2 C37.2 C38.2 C39.2 C40.2 C41.2 C42.2 C43.2 C44.2 C45.2 C46.2 C47.2 C48.2 C49.2 C50.2 C51.2 C52.2 C53.2 P1.5 R1.2 R2.2 R5.2 R6.2 R7.2 R8.2 R9.2 R10.2 R11.1 R12.1 TP1.1 U1.C1 U1.E7 U1.E8 U1.E9 U1.E10 U1.F4 U1.F5 U1.F11 U1.G5 U1.G11 U1.H5 U1.H11 U1.J5 U1.J11 U1.K5 U1.K11 U1.L5 U1.L7 U1.L8 U1.L9 U1.L10 U2.A7 U2.B2 U2.B7 U2.C9 U2.D9 U2.E1 U2.F9 U2.L1 U2.L7 U2.M9 U2.N9 U2.P2 U2.P7 U2.R7 U3.D3 U3.G4 U3.H8 U3.J6 | length 7.4
  Component Side w0.17: v1(-8.54,12.02) U1.C1 ; v1(-5.34,4.82) U1.L5 ; v1(-5.34,5.62) U1.K5 ; v1(-5.34,6.42) U1.J5 ; v1(-5.34,8.02) U1.H5 ; v1(-5.34,9.62) U1.F5 ; v1(-3.74,10.42) U1.E7 ; v1(-2.94,4.82) U1.L8 ; v1(-2.94,10.42) U1.E8 ; v1(-2.14,4.82) U1.L9 ; U1.E9 v1(-1.34,10.42) ; U1.J11 v1(0.26,6.42) ; U1.H11 v1(0.26,8.02)
AVCC: C29.2 U1.R1 | length 0.6
  Component Side w0.17: v1(-8.54,1.62) U1.R1
GND: C1.1 C2.1 C3.1 C4.1 C5.1 C6.1 C7.2 C8.1 C9.1 C10.1 C11.1 C12.1 C13.1 C14.1 C15.1 C16.1 C17.1 C18.1 C19.1 C20.1 C21.1 C22.1 C23.1 C24.1 C25.1 C26.1 C27.1 C28.1 C29.1 C30.2 C31.2 C32.2 C33.2 C34.1 C35.1 C36.1 C37.1 C38.1 C39.1 C40.1 C41.1 C42.1 C43.1 C44.1 C45.1 C46.1 C47.1 C48.1 C49.1 C50.1 C51.1 C52.1 C53.1 J1.1 J2.1 P1.3 R3.1 TP1.3 U1.F2 U1.F6 U1.F7 U1.F8 U1.F9 U1.F10 U1.G6 U1.G10 U1.H6 U1.H10 U1.J6 U1.J10 U1.K6 U1.K7 U1.K8 U1.K9 U1.K10 U1.L6 U1.M1 U2.A3 U2.B3 U2.B8 U2.C1 U2.D1 U2.E9 U2.F1 U2.L3 U2.L9 U2.M1 U2.N1 U2.P3 U2.P8 U2.R3 U3.C5 U3.F7 U3.K3 U3.K8 | length 5.9
  Component Side w0.17: v1(-8.54,4.02) U1.M1 ; U2.A3 v2(-8.14,-7.39) ; v1(-7.74,9.62) U1.F2 ; U1.H6 -3.626,7.62 -2.813,8.433 v1(-2.441,8.433) ; v1(-2.639,7.62) -1.86,7.62 U1.H10 ; U1.K8 -2.54,6.341 v1(-2.54,6.52)
MCU_TDI: U1.A13 | length 0.6
  Component Side w0.17: U1.A13 v1(1.86,13.62)
NAND_ALE: U1.M10 U3.C4 | length 13.6
  Component Side w0.17: U1.M10 -0.525,4.835 -0.525,6.979 -0.299,7.205 3.365,7.205 3.937,7.777 3.937,8.763 5.349,10.175 7.935,10.175 U3.C4
NAND_CLE: U1.N10 U3.D5 | length 13.7
  Component Side w0.17: U1.N10 v1(-0.54,3.22) ; v2(6.885,8.585) 6.895,8.595 8.735,8.595 U3.D5
  Inner Layer 1 w0.17: v1(-0.54,3.22) -0.54,5.06 1.62,7.22 5.52,7.22 v2(6.885,8.585)
NAND_NCE: U1.D9 U3.C6 | length 13.1
  Component Side w0.17: U1.D9 v1(-1.34,11.22) ; U3.C6 v2(9.925,10.345)
  Inner Layer 1 w0.17: v1(-1.34,11.22) -0.94,11.62 8.65,11.62 v2(9.925,10.345)
NAND_NR/B: U1.B11 U3.C8 | length 16.8
  Component Side w0.17: U1.B11 0.26,12.82 0.26,13.94 0.798,14.478 9.779,14.478 11.525,12.732 U3.C8
NAND_NRE: U1.D11 U3.D4 | length 11.5
  Component Side w0.17: v2(-0.54,11.22) U1.D11 ; v2(8.245,10.505) 8.725,10.025 8.725,9.385 U3.D4
  Inner Layer 1 w0.17: v2(-0.54,11.22) -0.155,10.835 7.915,10.835 v2(8.245,10.505)
NAND_NWE: U1.C10 U1.J3 U2.K8 U3.C7 | length 14.5
  Component Side w0.17: v1(-6.94,6.42) U1.J3 ; U2.K8 v2(-0.54,-4.35) ; U1.C10 v2(-0.54,12.02) ; U3.C7 v2(10.725,10.345)
  Inner Layer 1 w0.17: v2(-0.54,12.02) 0.516,12.02 0.901,12.405 8.665,12.405 v2(10.725,10.345)
NAND_NWP: U1.M12 U3.C3 | length 10.5
  Component Side w0.17: U1.M12 1.075,4.835 1.635,4.835 1.875,5.075 1.875,5.379 2.101,5.605 3.345,5.605 4.445,6.705 4.445,8.763 5.467,9.785 U3.C3
NetC1_2: C1.2 U1.E1 X1.1 | length 4.7
  Component Side w0.17: v1(-8.54,10.42) U1.E1
  Solder Side w0.17: C1.2 -11.375,11.855 X1.1 -9.751,11.275 -8.896,10.42 v1(-8.54,10.42)
NetC2_2: C2.2 U1.F1 X1.2 | length 4.7
  Component Side w0.17: v1(-8.54,9.62) U1.F1
  Solder Side w0.17: C2.2 -11.375,8.195 X1.2 -9.64,8.775 -8.795,9.62 v1(-8.54,9.62)
NetC3_2: C3.2 U1.H1 X2.1 | length 0.6
  Component Side w0.17: v1(-8.54,8.02) U1.H1
NetC4_2: C4.2 R4.2 X2.2
NetC6_2: C6.2 U1.L11
NetC8_2: C8.2 U1.E11
NetJ1_2: J1.2 R11.2 U1.E5 | length 0.6
  Component Side w0.17: v1(-5.34,10.42) U1.E5
NetJ2_2: J2.2 R12.2 U1.E6 | length 0.6
  Component Side w0.17: v1(-4.54,10.42) U1.E6
NetR4_1: R4.1 U1.G1
NRESET: U1.J1 | length 0.6
  Component Side w0.17: v1(-8.54,6.42) U1.J1
NRESET: TP1.5
RAM_ADDR0: U1.D2 U2.G8 | length 1.1
  Component Side w0.17: v1(-7.74,11.22) U1.D2 ; U2.G8 v2(-2.94,-4.35)
RAM_ADDR1: U1.E2 U2.G9 | length 0.6
  Component Side w0.17: v1(-7.74,10.42) U1.E2
RAM_ADDR2: U1.G2 U2.F7 | length 0.6
  Component Side w0.17: v2(-4.14,-5.31) U2.F7
RAM_ADDR3: U1.H2 U2.F3 | length 1.1
  Component Side w0.17: v1(-7.74,8.02) U1.H2 ; U2.F3 v2(-4.14,-7.39)
RAM_ADDR4: U1.J2 U2.G1 | length 0.6
  Component Side w0.17: v1(-7.74,6.42) U1.J2
RAM_ADDR5: U1.K3 U2.G2 | length 1.1
  Component Side w0.17: v1(-6.94,5.62) U1.K3 ; v2(-3.74,-9.15) U2.G2
RAM_ADDR6: U1.M6 U2.G3 | length 13.4
  Component Side w0.17: v2(-4.54,4.02) U1.M6 ; U2.G3 v2(-3.34,-7.39)
  Inner Layer 2 w0.17: v2(-4.54,4.02) -4.54,3.764 -4.925,3.379 -4.925,-5.805 v2(-3.34,-7.39)
RAM_ADDR7: U1.N6 U2.H1 | length 14.8
  Component Side w0.17: v2(-4.54,3.22) U1.N6 ; v2(-2.94,-9.15) U2.H1
  Inner Layer 1 w0.17: v2(-4.54,3.22) -4.925,2.835 -4.925,-2.525 -4.925,-7.149 -4.125,-7.949 -4.125,-8.509 -3.899,-8.735 -3.611,-8.735 -3.196,-9.15 v2(-2.94,-9.15)
RAM_ADDR8: U1.P6 U2.H2 | length 12.6
  Component Side w0.17: v2(-4.54,2.42) U1.P6 ; v2(-2.94,-8.35) U2.H2
  Inner Layer 2 w0.17: v2(-4.54,2.42) -4.54,-3.806 -4.155,-4.191 -4.155,-4.655 -3.725,-5.085 -3.725,-5.695 -2.94,-6.48 v2(-2.94,-8.35)
RAM_ADDR9: U1.M8 U2.J3 | length 13.7
  Component Side w0.17: v1(-2.94,4.02) U1.M8 ; U2.J3 v2(-1.74,-7.39)
  Inner Layer 2 w0.17: v1(-2.94,4.02) -2.94,2.964 -2.27,2.294 -2.27,-1.436 -1.355,-2.351 -1.355,-2.895 -1.725,-3.265 -1.725,-4.781 -1.355,-5.151 -1.355,-5.695 -1.74,-6.08 v2(-1.74,-7.39)
RAM_ADDR10: U1.N7 U2.G7 | length 10.2
  Component Side w0.17: v1(-3.74,3.22) U1.N7 ; v2(-3.34,-5.31) U2.G7
  Inner Layer 2 w0.17: v1(-3.74,3.22) -3.74,2.964 -4.155,2.549 -4.155,-3.809 -3.885,-4.079 -3.885,-4.543 -3.34,-5.088 v2(-3.34,-5.31)
RAM_ADDR11: U1.M7 U2.H9 | length 8.2
  Component Side w0.17: v1(-3.74,4.02) U1.M7 ; U2.H9 v2(-2.54,-2.51)
  Inner Layer 2 w0.17: v1(-3.74,4.02) -3.74,3.764 -3.355,3.379 -3.355,-1.695 v2(-2.54,-2.51)
RAM_I/O0: U1.L12 U2.R8 U3.H4 | length 8.2
  Component Side w0.17: U1.L12 v2(1.06,5.62) ; v2(6.32,5.62) 6.875,6.175 7.915,6.175 7.925,6.185 U3.H4
  Inner Layer 1 w0.17: v2(1.06,5.62) v2(6.32,5.62)
RAM_I/O1: U1.K13 U2.N7 U3.J4 | length 8.2
  Component Side w0.17: v2(1.46,-5.31) U2.N7 ; U1.K13 v2(1.86,6.42) ; v2(7.125,5.385) 7.925,5.385 U3.J4
  Inner Layer 1 w0.17: v2(1.86,6.42) 6.09,6.42 v2(7.125,5.385)
RAM_I/O2: U1.B12 U2.R9 U3.K4 | length 0.6
  Component Side w0.17: U1.B12 v1(1.06,12.82)
RAM_I/O3: U1.C12 U2.N8 U3.K5 | length 0.6
  Component Side w0.17: U1.C12 v1(1.06,12.02)
RAM_I/O4: U1.R8 U2.P9 U3.K6 | length 0.6
  Component Side w0.17: v1(-2.94,1.62) U1.R8
RAM_I/O5: U1.N9 U2.M8 U3.J7 | length 9.7
  Component Side w0.17: U1.N9 v1(-1.34,3.22) ; U2.M8 v2(1.06,-4.35)
  Inner Layer 2 w0.17: v1(-1.34,3.22) -0.925,2.805 -0.925,1.235 1.06,-0.75 v2(1.06,-4.35)
RAM_I/O6: U1.P9 U2.M7 U3.K7 | length 10
  Component Side w0.17: U1.P9 v1(-1.34,2.42) ; v2(0.66,-5.31) U2.M7
  Inner Layer 2 w0.17: v1(-1.34,2.42) -1.34,2.164 -1.725,1.779 -1.725,0.836 0.66,-1.549 v2(0.66,-5.31)
RAM_I/O7: U1.R9 U2.L8 U3.J8 | length 6.6
  Component Side w0.17: U1.R9 -1.34,1.62 -1.34,-1.71 -0.54,-2.51 -0.54,-3.55 U2.L8
RAM_I/O8: U1.P10 U2.L2 | length 1.1
  Component Side w0.17: U1.P10 v1(-0.54,2.42) ; v2(-0.54,-8.35) U2.L2
RAM_I/O9: U1.R10 U2.M3 | length 11.9
  Component Side w0.17: U1.R10 -0.94,0.127 1.05,-1.863 1.05,-3.38 1.23,-3.56 1.622,-3.56 1.86,-3.798 1.86,-5.454 0.66,-6.654 U2.M3
RAM_I/O10: U1.R12 U2.M2 | length 14.3
  Component Side w0.17: U2.M2 1.06,-9.15 1.7,-9.15 1.86,-8.99 1.86,-7.55 3.46,-5.95 3.46,-2.673 0.66,0.127 U1.R12
RAM_I/O11: U1.P11 U2.P1 | length 0.6
  Component Side w0.17: U1.P11 v1(0.26,2.42)
RAM_I/O12: U1.R11 U2.N2 | length 12.9
  Component Side w0.17: U1.R11 -0.14,0.127 1.87,-1.883 1.87,-3.312 2.118,-3.56 2.422,-3.56 2.66,-3.798 2.66,-5.07 1.06,-6.67 1.06,-8.35 U2.N2
RAM_I/O13: U1.L15 U2.R1 | length 0.6
  Component Side w0.17: U1.L15 v1(3.46,4.82)
RAM_I/O14: U1.L14 U2.N3 | length 0.6
  Component Side w0.17: U1.L14 v1(2.66,4.82)
RAM_I/O15: U1.K15 U2.R2
RAM_I/O16: U1.P14 U2.E8 | length 1.1
  Component Side w0.17: U2.E8 v2(-4.54,-4.35) ; U1.P14 v1(2.66,2.42)
RAM_I/O17: U1.N14 U2.D7 | length 1.1
  Component Side w0.17: v2(-5.74,-5.31) U2.D7 ; U1.N14 v1(2.66,3.22)
RAM_I/O18: U1.P15 U2.D8 | length 1.1
  Component Side w0.17: U2.D8 v2(-5.34,-4.35) ; U1.P15 v1(3.46,2.42)
RAM_I/O19: U1.N15 U2.B9 | length 0.6
  Component Side w0.17: U1.N15 v1(3.46,3.22)
RAM_I/O20: U1.M15 U2.C8 | length 1.1
  Component Side w0.17: U2.C8 v2(-6.14,-4.35) ; U1.M15 v1(3.46,4.02)
RAM_I/O21: U1.E12 U2.A9 | length 1.1
  Component Side w0.17: v2(-8.54,-3.55) U2.A9 ; U1.E12 v1(1.06,10.42)
RAM_I/O22: U1.E13 U2.C7 | length 1.1
  Component Side w0.17: v2(-6.54,-5.31) U2.C7 ; U1.E13 v1(1.86,10.42)
RAM_I/O23: U1.D13 U2.A8 | length 0.6
  Component Side w0.17: U1.D13 v1(1.86,11.22)
RAM_I/O24: U1.E14 U2.A2 | length 0.6
  Component Side w0.17: U1.E14 v1(2.66,10.42)
RAM_I/O25: U1.D14 U2.C3 | length 1.1
  Component Side w0.17: U2.C3 v2(-6.54,-7.39) ; U1.D14 v1(2.66,11.22)
RAM_I/O26: U1.C14 U2.A1 | length 0.6
  Component Side w0.17: U1.C14 v1(2.66,12.02)
RAM_I/O27: U1.C13 U2.C2 | length 1.1
  Component Side w0.17: U2.C2 v2(-6.14,-8.35) ; U1.C13 v1(1.86,12.02)
RAM_I/O28: U1.D6 U2.B1 | length 0.6
  Component Side w0.17: v1(-4.54,11.22) U1.D6
RAM_I/O29: U1.D4 U2.D2 | length 1.1
  Component Side w0.17: v1(-6.14,11.22) U1.D4 ; U2.D2 v2(-5.34,-8.35)
RAM_I/O30: U1.E4 U2.D3 | length 1.1
  Component Side w0.17: v1(-6.14,10.42) U1.E4 ; U2.D3 v2(-5.74,-7.39)
RAM_I/O31: U1.D5 U2.E2 | length 1.1
  Component Side w0.17: v1(-5.34,11.22) U1.D5 ; U2.E2 v2(-4.54,-8.35)
SDMMC_CK: P1.4 R8.1 U1.A12 | length 0.6
  Component Side w0.17: U1.A12 v1(1.06,13.62)
SDMMC_CMD: P1.6 R7.1 U1.D12 | length 0.6
  Component Side w0.17: U1.D12 v1(1.06,11.22)
SDMMC_D0: P1.2 R9.1 U1.G14 | length 0.6
  Component Side w0.17: U1.G14 v1(2.66,8.82)
SDMMC_D1: P1.1 R10.1 U1.F14 | length 0.6
  Component Side w0.17: U1.F14 v1(2.66,9.62)
SDMMC_D2: P1.8 R5.1 U1.B14 | length 0.6
  Component Side w0.17: U1.B14 v1(2.66,12.82)
SDMMC_D3: P1.7 R6.1 U1.B13 | length 0.6
  Component Side w0.17: U1.B13 v1(1.86,12.82)
SDRAM_BA0: U1.N12 U2.J7 | length 1.1
  Component Side w0.17: v2(-1.74,-5.31) U2.J7 ; U1.N12 v1(1.06,3.22)
SDRAM_BA1: U1.N11 U2.H8 | length 1.1
  Component Side w0.17: U2.H8 v2(-2.14,-4.35) ; U1.N11 v1(0.26,3.22)
SDRAM_CKE: U1.K4 U2.J2 | length 1.1
  Component Side w0.17: v1(-6.14,5.62) U1.K4 ; v2(-2.14,-8.35) U2.J2
SDRAM_CLK: U1.H14 U2.J1 | length 0.6
  Component Side w0.17: U1.H14 v1(2.66,8.02)
SDRAM_DQM0: U1.A6 U2.K9 | length 0.6
  Component Side w0.17: v1(-4.54,13.62) U1.A6
SDRAM_DQM1: U1.A5 U2.K1 | length 0.6
  Component Side w0.17: v1(-5.34,13.62) U1.A5
SDRAM_DQM2: U1.C3 U2.F8 | length 1.1
  Component Side w0.17: v1(-6.94,12.02) U1.C3 ; U2.F8 -3.74,-4.35
  other v2: -3.762,-3.658
SDRAM_DQM3: U1.D3 U2.F2 | length 1.1
  Component Side w0.17: v1(-6.94,11.22) U1.D3 ; U2.F2 v2(-3.74,-8.35)
SDRAM_NCAS: U1.B7 U2.K7 | length 1.1
  Component Side w0.17: v1(-3.74,12.82) U1.B7 ; v2(-0.94,-5.31) U2.K7
SDRAM_NCS: U1.J4 U2.J8 | length 1.1
  Component Side w0.17: v1(-6.14,6.42) U1.J4 ; U2.J8 v2(-1.34,-4.35)
SDRAM_NRAS: U1.P8 U2.J9 | length 6.6
  Component Side w0.17: v1(-2.94,2.42) U1.P8 ; U2.J9 v2(-1.74,-2.51)
  Inner Layer 2 w0.17: v1(-2.94,2.42) -2.54,2.02 -2.54,-1.71 v2(-1.74,-2.51)
SWCLK: R3.2 TP1.2 U1.A14 | length 0.6
  Component Side w0.17: U1.A14 v1(2.66,13.62)
SWDIO: R1.1 TP1.4 U1.A15 | length 0.6
  Component Side w0.17: U1.A15 v1(3.46,13.62)
SWO: R2.1 TP1.6 U1.A10
USART3_RX: U1.R13 | length 0.6
  Component Side w0.17: U1.R13 v1(1.86,1.62)
USART3_TX: U1.P12 | length 0.6
  Component Side w0.17: U1.P12 v1(1.06,2.42)
pads on no net: P1.0 U1.A1 U1.A2 U1.A3 U1.A4 U1.A7 U1.A8 U1.A9 U1.A11 U1.B1 U1.B2 U1.B3 U1.B4 U1.B5 U1.B6 U1.B8 U1.B9 U1.B10 U1.B15 U1.C2 U1.C4 U1.C5 U1.C6 U1.C7 U1.C8 U1.C9 U1.C11 U1.C15 U1.D1 U1.D7 U1.D8 U1.D10 U1.D15 U1.E3 U1.E15 U1.F3 U1.F12 U1.F13 U1.F15 U1.G3 U1.G4 U1.G12 U1.G13 U1.G15 U1.H3 U1.H4 U1.H12 U1.H13 U1.H15 U1.J12 U1.J13 U1.J14 U1.J15 U1.K1 U1.K2 U1.K12 U1.K14 U1.L1 U1.L2 U1.L3 U1.L4 U1.L13 U1.M2 U1.M3 U1.M4 U1.M5 U1.M9 U1.M11 U1.M13 U1.M14 U1.N1 U1.N2 U1.N3 U1.N4 U1.N5 U1.N8 U1.N13 U1.P1 U1.P2 U1.P3 U1.P4 U1.P5 U1.P7 U1.P13 U1.R2 U1.R3 U1.R4 U1.R5 U1.R6 U1.R7 U1.R14 U1.R15 U2.E3 U2.E7 U2.H3 U2.H7 U2.K2 U2.K3 U3.A1 U3.A2 U3.A9 U3.A10 U3.B1 U3.B9 U3.B10 U3.D6 U3.D7 U3.D8 U3.E3 U3.E4 U3.E5 U3.E6 U3.E7 U3.E8 U3.F3 U3.F4 U3.F5 U3.F6 U3.F8 U3.G3 U3.G5 U3.G6 U3.G7 U3.G8 U3.H3 U3.H5 U3.H6 U3.H7 U3.J3 U3.J5 U3.L1 U3.L2 U3.L9 U3.L10 U3.M1 U3.M2 U3.M9 U3.M10
copper on no net: | length 36.8
  Component Side w0.17: v1(-8.54,2.42) -8.14,2.82 ; v1(-8.54,3.22) -8.14,3.62 ; v1(-8.54,4.82) -8.14,5.22 ; v1(-8.54,5.62) -8.14,6.02 ; v1(-8.54,12.82) -8.14,12.42 ; v1(-8.54,13.62) -8.14,13.22 ; v1(-7.74,2.42) -7.34,2.82 ; v1(-7.74,3.22) -7.34,3.62 ; v1(-7.74,4.02) -7.34,4.42 ; v1(-7.74,4.82) -7.34,5.22 ; v1(-7.74,5.62) -7.34,6.02 ; v1(-7.74,12.02) -7.34,11.62 ; v1(-7.74,12.82) -7.34,12.42 ; v1(-7.74,13.62) -7.34,13.22 ; v1(-6.94,2.42) -6.54,2.82 ; v1(-6.94,3.22) -6.54,3.62 ; v1(-6.94,4.02) -6.54,4.42 ; v1(-6.94,4.82) -6.54,5.22 ; v1(-6.94,8.02) -6.54,7.62 ; v1(-6.94,10.42) -6.54,10.02 ; v1(-6.94,12.82) -6.54,12.42 ; v1(-6.94,13.62) -6.54,13.22 ; v1(-6.14,2.42) -5.74,2.82 ; v1(-6.14,3.22) -5.74,3.62 ; v1(-6.14,4.02) -5.74,4.42 ; v1(-6.14,4.82) -5.74,5.22 ; v1(-6.14,8.02) -5.74,7.62 ; v1(-6.14,12.02) -5.74,11.62 ; v1(-6.14,12.82) -5.74,12.42 ; v1(-6.14,13.62) -5.74,13.22 ; v1(-5.34,2.42) -4.94,2.82 ; v1(-5.34,3.22) -4.94,3.62 ; v1(-5.34,4.02) -4.94,4.42 ; v1(-5.34,12.02) -4.94,11.62 ; v1(-5.34,12.82) -4.94,12.42 ; v1(-4.54,12.02) -4.14,11.62 ; v1(-4.54,12.82) -4.14,12.42 ; v1(-3.74,2.42) -3.34,2.82 ; v1(-3.74,11.22) -3.34,10.82 ; v1(-3.74,12.02) -3.34,11.62 ; v1(-3.74,13.62) -3.34,13.22 ; v1(-2.94,11.22) -2.54,10.82 ; v1(-2.94,12.02) -2.54,11.62 ; v1(-2.94,12.82) -2.54,12.42 ; v1(-2.94,13.62) -2.54,13.22 ; -1.74,11.62 v1(-1.34,12.02) ; -1.74,12.42 v1(-1.34,12.82) ; -1.74,13.22 v1(-1.34,13.62) ; 0.66,7.62 v1(1.06,8.02) ; 1.46,2.82 v1(1.86,2.42) ; 1.46,3.62 v1(1.86,3.22) ; 1.46,4.42 v1(1.86,4.02) ; 1.46,7.62 v1(1.86,8.02) ; 1.46,8.42 v1(1.86,8.82) ; 1.46,9.22 v1(1.86,9.62) ; 2.26,2.02 v1(2.66,1.62) ; 2.26,4.42 v1(2.66,4.02) ; 3.06,2.02 v1(3.46,1.62) ; 3.06,7.62 v1(3.46,8.02) ; 3.06,8.42 v1(3.46,8.82) ; 3.06,9.22 v1(3.46,9.62) ; 3.06,10.02 v1(3.46,10.42) ; 3.06,10.82 v1(3.46,11.22) ; 3.06,11.62 v1(3.46,12.02) ; 3.06,12.42 v1(3.46,12.82)

## Polygon pours and split planes (outlines as drawn)
no net on Ground Plane (GND) (split plane): 16.99,-16.99 -16.99,-16.99 -16.99,16.99 16.99,16.99
no net on Power Plane (VCC) (split plane): 16.99,-16.99 -16.99,-16.99 -16.99,16.99 16.99,16.99

## Keep-outs
Keep-Out Layer:
  the board outline again, w0.5

## Dimensions
-17.5,-17.5 to 17.5,-17.5 on Keep-Out Layer
17.5,17.5 to 17.5,-17.5 on Keep-Out Layer